# Altium PCB Thrust_Tester.PcbDoc
Units mil, origin at the board's own origin, x right, y up, seen from the top; angles counter-clockwise.
Board outline 3425.2 x 2007.87 mil, 2 copper layers (Top Layer, Bottom Layer); 81 components, 71 nets, 313 pads, 62 vias.
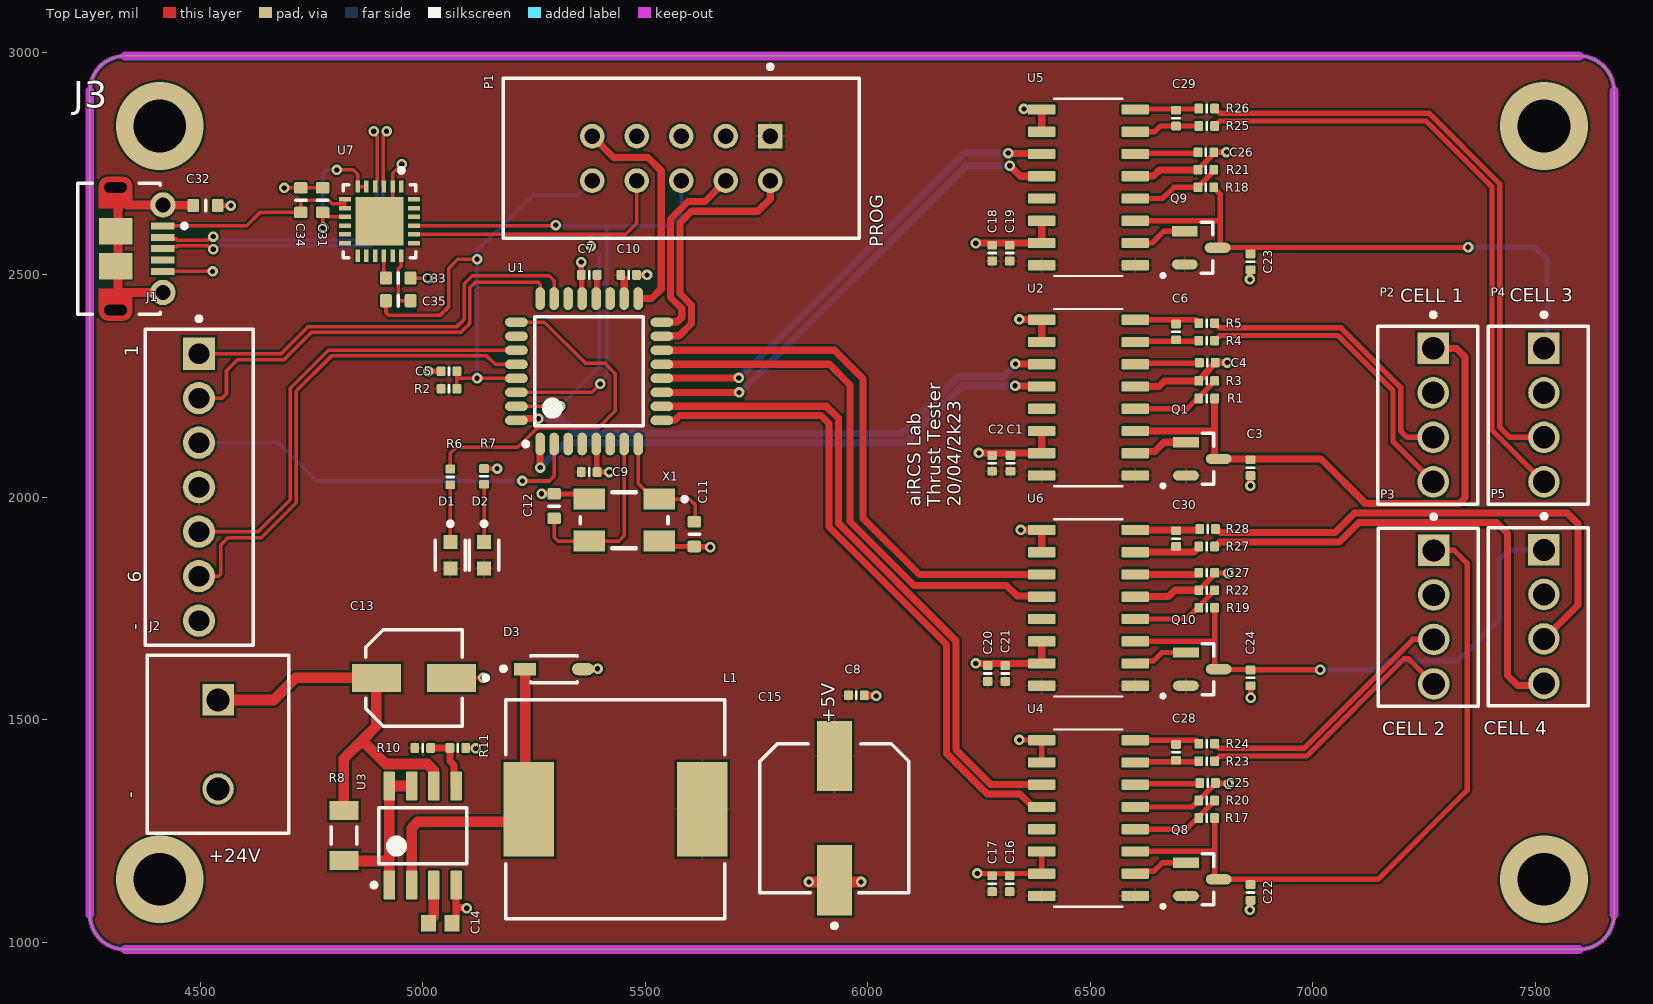
[diagram p0: Top Layer view]
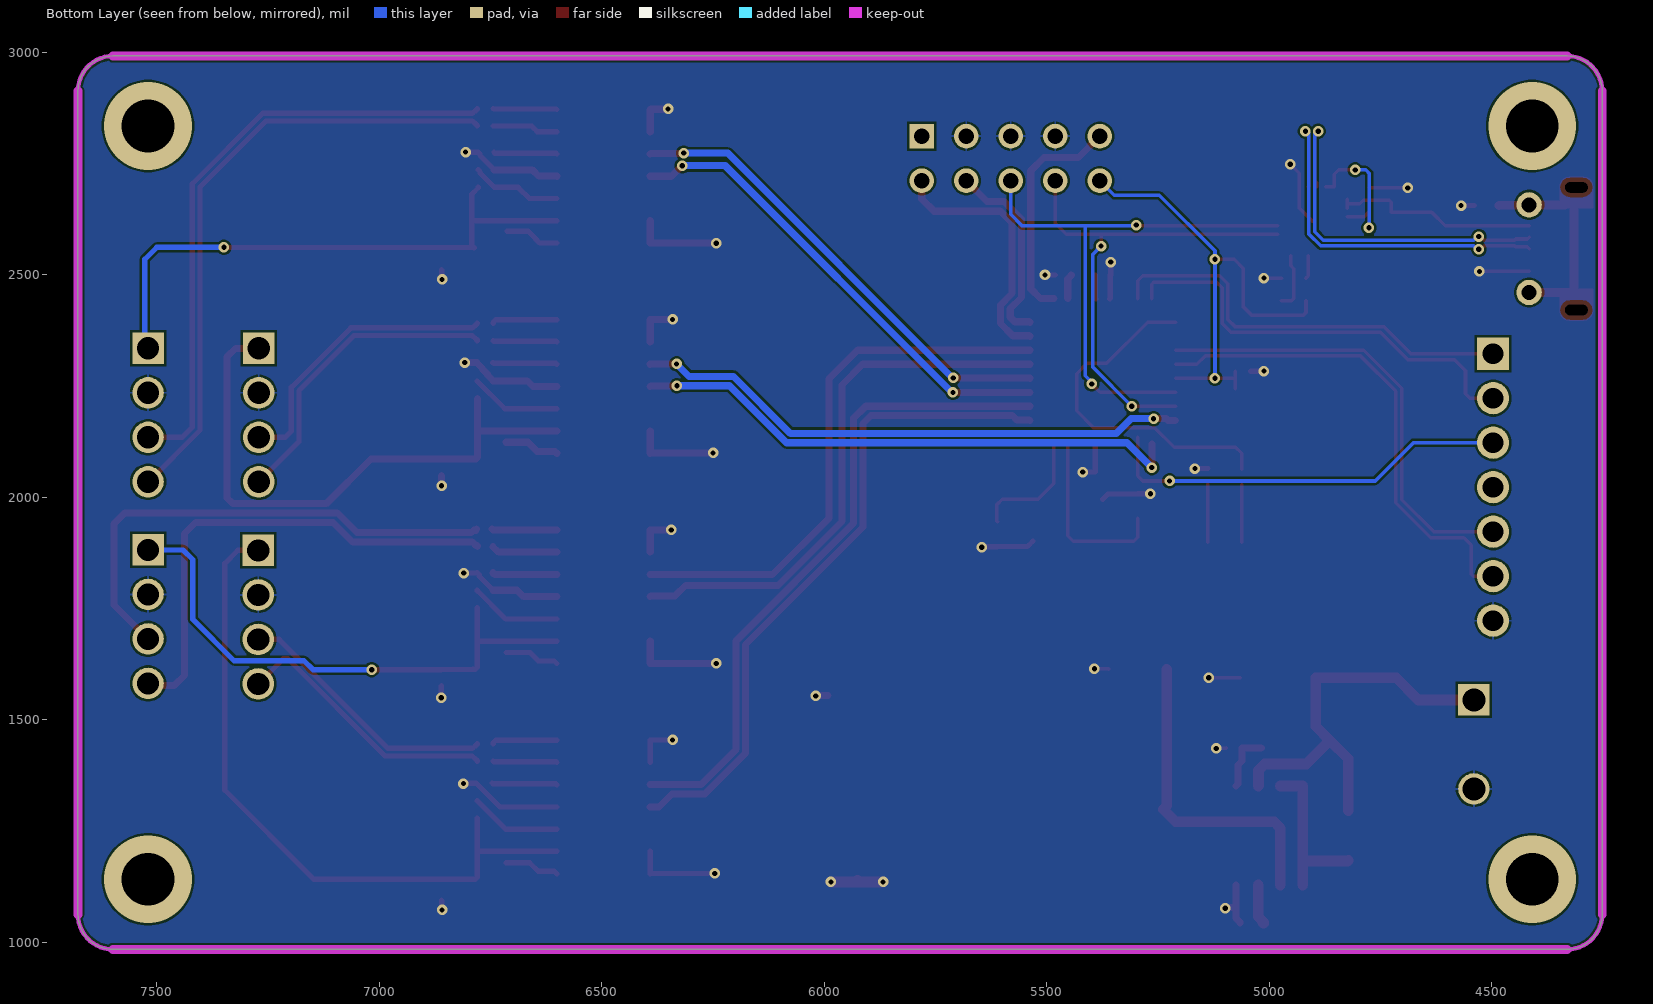
[diagram p1: Bottom Layer view, seen from below]
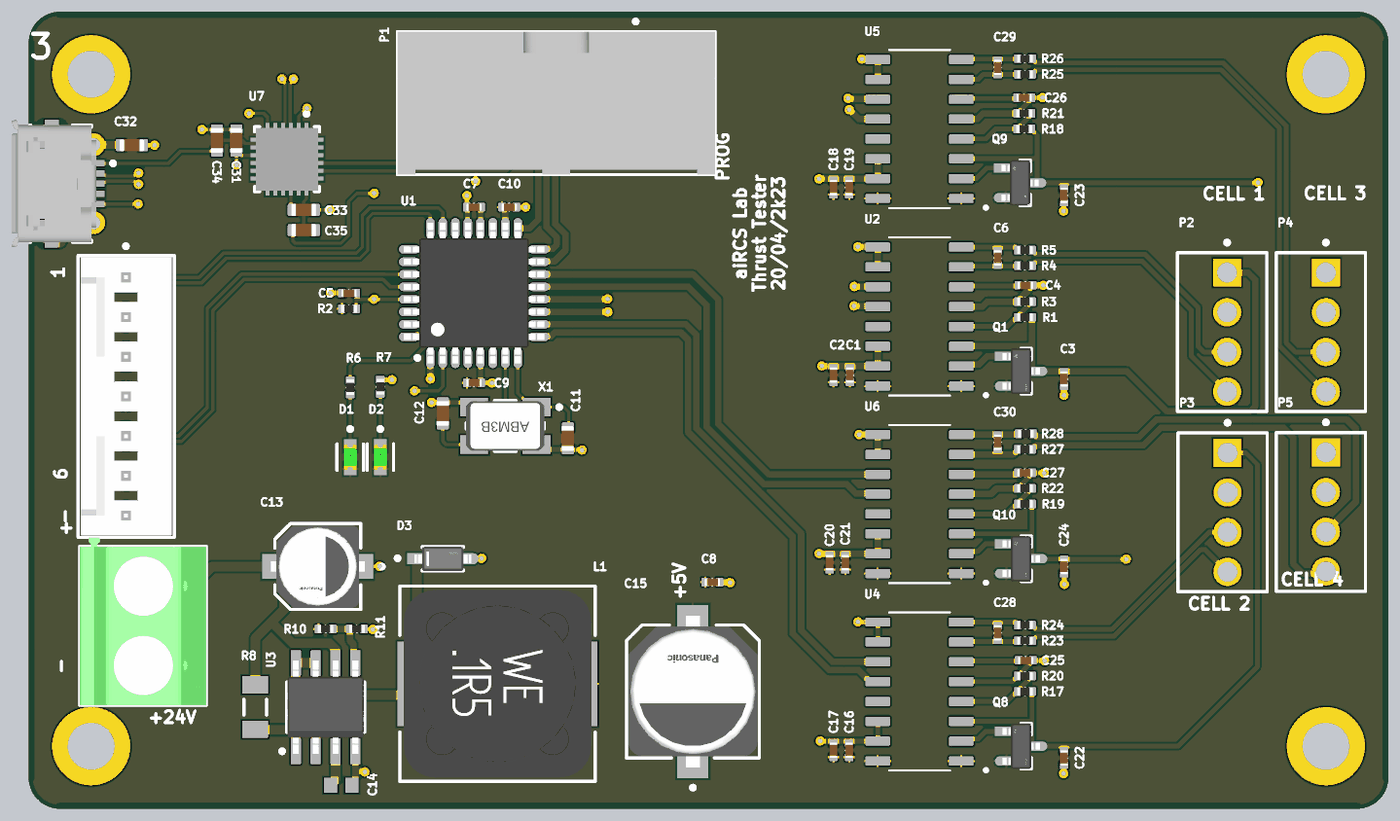
[diagram p2: 3D render of the assembled board from above, using the file's embedded part models]

## Layer stack, top to bottom
Top Solder: solder mask 0.4, Solder Resist, Dk 3.5
Top Layer: signal copper 1.4
Dielectric 1: dielectric 12.6, FR-4, Dk 4.8
Bottom Layer: signal copper 1.4
Bottom Solder: solder mask 0.4, Solder Resist, Dk 3.5

## Board outline
4251.97,1062.82 ccw(c4330.71,1062.99) 4330.71,984.25 7598.43,984.25 7598.6,984.25 ccw(c7598.43,1062.99) 7677.17,1062.99 7677.17,2913.39 7677.17,2913.56 ccw(c7598.43,2913.39) 7598.43,2992.13 4330.71,2992.13 4330.53,2992.13 ccw(c4330.71,2913.39) 4251.97,2913.39

## Design rules (kind name [scope] priority, off if disabled: settings)
BoardOutlineClearance [All] p1: gap=7.87 ignorepadtopadclearanceinfootprint=FALSE
Clearance [All] p1: gap=5 ignorepadtopadclearanceinfootprint=FALSE except(9.84: Arc-Hole Track-Hole SMDPad-Hole THPad-Hole Via-Hole Fill-Hole Poly-Hole Region-Hole Text-Hole)
ComponentClearance [All] p1: gap=5 collisioncheckmode=3 verticalgap=5 showdistances=TRUE
DiffPairsRouting [All] p1: maxlimit=10 minlimit=5 mostfreqgap=5 toplayer_minwidth=5 toplayer_maxwidth=1000 toplayer_prefwidth=5 bottomlayer_minwidth=5 bottomlayer_maxwidth=1000 bottomlayer_prefwidth=5 maxuncoupledlength=500
Height [All] p1: minheight=0 maxheight=71497.94 prefheight=500
HoleSize [All] p1: absolutevalues=TRUE maxlimit=248.03 minlimit=11.81 maxpercent=80.000 minpercent=20.000
HoleToHoleClearance [All] p1: gap=9.84 allowstackedmicrovias=FALSE
MinimumAnnularRing [All] p1: minimumring=3
MinimumSolderMaskSliver [All] p1: minsoldermaskwidth=0
PlaneClearance [All] p1: clearance=5
PlaneConnect PlaneConnectPowerPads [InPadClass('PowerPads')] p1: planeconnectstyle=Direct reliefexpansion=20 reliefentries=4 reliefconductorwidth=10 reliefairgap=10
PlaneConnect [All] p2: pad.planeconnectstyle=Relief pad.reliefexpansion=11.81 pad.reliefentries=4 pad.reliefconductorwidth=5 pad.reliefairgap=5 via.planeconnectstyle=Direct via.reliefexpansion=11.81 via.reliefentries=4 via.reliefconductorwidth=5 via.reliefairgap=5
PolygonConnect PolygonConnectPowerPads [All vs (InPadClass('PowerPads'))] p1: connectstyle=Direct reliefconductorwidth=10 reliefentries=4 polygonreliefangle="90 Angle" airgapwidth=10
PolygonConnect [All] p2: thpad.connectstyle=Relief thpad.reliefconductorwidth=5 thpad.reliefentries=4 thpad.polygonreliefangle="90 Angle" thpad.airgapwidth=5 smdpad.connectstyle=Relief smdpad.reliefconductorwidth=5 smdpad.reliefentries=4 smdpad.polygonreliefangle="90 Angle" smdpad.airgapwidth=5 via.connectstyle=Direct via.reliefconductorwidth=5 via.reliefentries=4 via.polygonreliefangle="90 Angle" via.airgapwidth=5
RoutingVias [All] p1: holewidth=11.81 width=23.62 viastyle="Through Hole" minholewidth=11.81 minwidth=23.62 maxholewidth=23.62 maxwidth=259.84
SilkToSilkClearance [All] p1: silktosilkclearance=0
SilkToSolderMaskClearance [IsPad] p1: minsilkscreentomaskgap=5 clearancetoexposedcopper=TRUE
SolderMaskExpansion [All] p1: expansion=2.95 istentingtop=FALSE
Width [All] p1: maxlimit=1000 minlimit=5 preferedwidth=5 minimp=50.000000 maximp=50.000000 favimp=50.000000
20 further rules are at their usual default settings.

## Classes and differential pairs
component class Sensors: C16 C17 C18 C19 C20 C21 C22 C23 C24 C25 C26 C27 C28 C29 C30 P3 P4 P5 Q8 Q9 Q10 R17 R18 R19 R20 R21 R22 R23 R24 R25 R26 R27 R28 U4 U5 U6
component class PSU: C13 C14 C15 D3 J1 J2 L1 R8 R10 R11 U3
component class CPU: C1 C2 C3 C4 C5 C6 C7 C8 C9 C10 C11 C12 C31 C32 C33 C34 C35 D1 D2 J3 P1 P2 Q1 R1 R2 R3 R4 R5 R6 R7 U1 U2 U7 X1
differential pair D: +D_P -D_N

## Components (designator, comment, footprint, x,y, rotation, side; value= is the part's Value field where it differs from the comment)
C1 "Capacitor 100nF +/-20% 50V 0402" CAPC0402(1005)60_L 6320.87,2076.77 r270 top value=100nF
C2 "Capacitor 10µF +/-40% 6.3V 0402" CAPC0402(1005)60_L 6279.53,2076.77 r270 top value=10µF
C3 "Capacitor 10µF +/-40% 6.3V 0402" CAPC0402(1005)60_L 6860.24,2066.93 r90 top value=10µF
C4 "Capacitor 100nF +/-20% 50V 0402" CAPC0402(1005)60_L 6763,2303 r0 top value=100nF
C5 "Capacitor 100nF +/-20% 50V 0402" CAPC0402(1005)60_L 5059.06,2283.46 r180 top value=100nF
C6 "Capacitor 100nF +/-20% 50V 0402" CAPC0402(1005)60_L 6692.91,2372.05 r270 top value=100nF
C7 "Capacitor 100nF +/-20% 50V 0402" CAPC0402(1005)60_L 5374.02,2500 r180 top value=100nF
C8 "Capacitor 100nF +/-20% 50V 0402" CAPC0402(1005)60_L 5974.41,1555.12 r180 top value=100nF
C9 "Capacitor 100nF +/-20% 50V 0402" CAPC0402(1005)60_L 5374.02,2057.09 r180 top value=100nF
C10 "Capacitor 100nF +/-20% 50V 0402" CAPC0402(1005)60_L 5462.6,2500 r180 top value=100nF
C11 "Capacitor 1µF +/-40% 50V 0603" CAPC0603(1608)100_L 5610.24,1917.32 r270 top value=22pF
C12 "Capacitor 1µF +/-40% 50V 0603" CAPC0603(1608)100_L 5295.28,1980.31 r90 top value=22pF
C13 "EEE-1AA101WR" FP-SC-MFG 4980.31,1594.49 r180 top
C14 "470pF" CAPC1608X90X35NL10T15 5039.37,1043.31 r180 top
C15 "EEEFT1E471AP" FP-FTF-MFG 5925.2,1279.53 r90 top
C16 "Capacitor 100nF +/-20% 50V 0402" CAPC0402(1005)60_L 6318.9,1131.89 r270 top value=100nF
C17 "Capacitor 10µF +/-40% 6.3V 0402" CAPC0402(1005)60_L 6279.53,1131.89 r270 top value=10µF
C18 "Capacitor 100nF +/-20% 50V 0402" CAPC0402(1005)60_L 6279.53,2549.21 r270 top value=100nF
C19 "Capacitor 10µF +/-40% 6.3V 0402" CAPC0402(1005)60_L 6318.9,2549.21 r270 top value=10µF
C20 "Capacitor 100nF +/-20% 50V 0402" CAPC0402(1005)60_L 6269.69,1604.33 r270 top value=100nF
C21 "Capacitor 10µF +/-40% 6.3V 0402" CAPC0402(1005)60_L 6309.06,1604.33 r270 top value=10µF
C22 "Capacitor 10µF +/-40% 6.3V 0402" CAPC0402(1005)60_L 6860.24,1112.2 r90 top value=10µF
C23 "Capacitor 10µF +/-40% 6.3V 0402" CAPC0402(1005)60_L 6860.24,2529.53 r90 top value=10µF
C24 "Capacitor 10µF +/-40% 6.3V 0402" CAPC0402(1005)60_L 6860.24,1594.49 r90 top value=10µF
C25 "Capacitor 100nF +/-20% 50V 0402" CAPC0402(1005)60_L 6763.78,1358.27 r0 top value=100nF
C26 "Capacitor 100nF +/-20% 50V 0402" CAPC0402(1005)60_L 6759.84,2775.59 r0 top value=100nF
C27 "Capacitor 100nF +/-20% 50V 0402" CAPC0402(1005)60_L 6761.81,1830.71 r0 top value=100nF
C28 "Capacitor 100nF +/-20% 50V 0402" CAPC0402(1005)60_L 6692.91,1427.17 r270 top value=100nF
C29 "Capacitor 100nF +/-20% 50V 0402" CAPC0402(1005)60_L 6692.91,2852.36 r270 top value=100nF
C30 "Capacitor 100nF +/-20% 50V 0402" CAPC0402(1005)60_L 6692.91,1907.48 r270 top value=100nF
C31 "Capacitor 1µF +/-40% 50V 0603" CAPC0603(1608)100_L 4775,2668 r90 top value=100nF
C32 "Capacitor 1µF +/-40% 50V 0603" CAPC0603(1608)100_L 4512,2656 r0 top value=100nF
C33 "Capacitor 1µF +/-40% 50V 0603" CAPC0603(1608)100_L 4945,2493 r0 top value=100nF
C34 "Capacitor 1µF +/-40% 50V 0603" CAPC0603(1608)100_L 4726,2668 r90 top value=100nF
C35 "Capacitor 1µF +/-40% 50V 0603" CAPC0603(1608)100_L 4945,2442 r0 top value=100nF
D1 "LTST-C190GKT" FP-LTST-C190GKT-MFG 5062,1870 r270 top
D2 "LTST-C190GKT" FP-LTST-C190GKT-MFG 5137.8,1870.08 r270 top
D3 "1N5819HW-7-F" FP-SOD123-IPC_B 5295.28,1614.17 r0 top
J1 "22-27-2071" FP-22-27-2071-MFG 4497.79,2023 r90 top
J2 "1729128" PHOE-1729128-2_V 4540,1445 r270 top
J3 "105017-0001" USB-MICRO-B_V 4363,2559 r270 top
L1 "744771220" WE-PD-L 5433.07,1299.21 r0 top
P1 "5103309-1" TECO-5103309-1_V 5581,2762 r0 top
P2 "640456-4" TECO-640456-4 7271,2185 r90 top
P3 "640456-4" TECO-640456-4 7272,1731 r90 top
P4 "640456-4" TECO-640456-4 7519.69,2185.04 r90 top
P5 "640456-4" TECO-640456-4 7519.69,1732.02 r90 top
Q1 "MMSS8550-H-TP" FP-SOT-23-IPC_B 6751.97,2086.61 r0 top
Q8 "MMSS8550-H-TP" FP-SOT-23-IPC_B 6751.97,1141.73 r0 top
Q9 "MMSS8550-H-TP" FP-SOT-23-IPC_B 6749.42,2561.02 r0 top
Q10 "MMSS8550-H-TP" FP-SOT-23-IPC_B 6751.97,1614.17 r0 top
R1 "RES" RESC0402(1005)_L 6761.81,2222.44 r0 top value=20k
R2 "1k" RESC0402(1005)_L 5059.06,2244.09 r180 top
R3 "" RESC0402(1005)_L 6761.81,2261.81 r0 top value=8.2k
R4 "100" RESC0402(1005)_L 6761.81,2352.36 r180 top
R5 "100" RESC0402(1005)_L 6761.81,2391.73 r180 top
R6 "1k" RESC0402(1005)_L 5062,2046 r270 top
R7 "1k" RESC0402(1005)_L 5137.8,2047.24 r270 top
R8 "ERJ8BQFR33V" RESC3216X70X50NL05T20 4822.83,1240.16 r90 top
R10 "3.6k" RESC0402(1005)_L 5000,1437.01 r0 top
R11 "1.2k" RESC0402(1005)_L 5078.74,1437.01 r180 top
R17 "RES" RESC0402(1005)_L 6761.81,1279.53 r0 top
R18 "RES" RESC0402(1005)_L 6759.84,2696.85 r0 top
R19 "RES" RESC0402(1005)_L 6761.81,1751.97 r0 top
R20 "RES" RESC0402(1005)_L 6761.81,1318.9 r0 top
R21 "RES" RESC0402(1005)_L 6759.84,2736.22 r0 top
R22 "RES" RESC0402(1005)_L 6761.81,1791.34 r0 top
R23 "100" RESC0402(1005)_L 6761.81,1407.48 r180 top
R24 "100" RESC0402(1005)_L 6761.81,1446.85 r180 top
R25 "100" RESC0402(1005)_L 6761.81,2834.65 r180 top
R26 "100" RESC0402(1005)_L 6761.81,2874.02 r180 top
R27 "100" RESC0402(1005)_L 6761.81,1889.76 r180 top
R28 "100" RESC0402(1005)_L 6763.78,1929.13 r180 top
U1 "ATMEGA328PB-AU" ATML-32A_L 5374.02,2283.46 r90 top
U2 "HX711" SOP127P600X180-16N 6496.06,2224.41 r180 top
U3 "MC34063ADR" D0008A_M 5000,1240.16 r90 top
U4 "HX711" SOP127P600X180-16N 6496.06,1279.53 r180 top
U5 "HX711" SOP127P600X180-16N 6496.06,2696.85 r180 top
U6 "HX711" SOP127P600X180-16N 6496.06,1751.97 r180 top
U7 "CP2104-F03-GM" FP-CP2104-F03-GM-MFG 4902.84,2620.76 r270 top
X1 "ABM3B-16.000MHZ-B2-T" ABRA-ABM3B-4_V 5452.76,1948.82 r180 top

## Footprints (in the part's own frame and the unit in brackets; to place one, negate y for a bottom-side part, rotate by r counter-clockwise, add the part's x,y. Pads: shape width x height; smd on the part's side, far side on the other; paste and mask are expansions set on the pad)
ABRA-ABM3B-4_V [mm] "SMD, 4-Leads, Body 5x3.2mm"
  rect 1.8x1.2 smd: 1(-2,-1.2) 2(2,-1.2) 3(2,1.2) 4(-2,1.2)
  silkscreen extent -3.58,-1.6 2.5,1.6, body extent -2.5,-1.59 2.5,1.59, height 1.13
ATML-32A_L [mm] "TQFP, 32-Leads, Body 7x7mm, Pitch 0.8mm, IPC High Density"
  oval 1.3x0.55 smd: 1(-4.15,2.8) 2(-4.15,2) 3(-4.15,1.2) 4(-4.15,0.4) 5(-4.15,-0.4) 6(-4.15,-1.2) 7(-4.15,-2) 8(-4.15,-2.8) 17(4.15,-2.8) 18(4.15,-2) 19(4.15,-1.2) 20(4.15,-0.4) 21(4.15,0.4) 22(4.15,1.2) 23(4.15,2) 24(4.15,2.8)
  oval 0.55x1.3 smd: 9(-2.8,-4.15) 10(-2,-4.15) 11(-1.2,-4.15) 12(-0.4,-4.15) 13(0.4,-4.15) 14(1.2,-4.15) 15(2,-4.15) 16(2.8,-4.15) 25(2.8,4.15) 26(2,4.15) 27(1.2,4.15) 28(0.4,4.15) 29(-0.4,4.15) 30(-1.2,4.15) 31(-2,4.15) 32(-2.8,4.15)
  silkscreen extent -4.27,-3.1 3.1,3.75, body extent -4.5,-4.5 4.5,4.5, height 1.2
CAPC0402(1005)60_L [mm] "Chip Capacitor, Body 1.0x0.5mm, Height 0.6mm, IPC High Density"
  rrect25% 0.5x0.55 smd: 1(-0.45,0) 2(0.45,0)
  silkscreen extent 0,-0.2 0,0.2, body extent -0.5,-0.25 0.5,0.25, height 0.6
CAPC0603(1608)100_L [mm] "Chip Capacitor, Body 1.6x0.8mm, Height 1.0mm, IPC High Density"
  rrect25% 0.66x0.76 smd: 1(-0.7,0) 2(0.7,0)
  silkscreen extent 0,-0.3 0,0.3, body extent -0.8,-0.4 0.8,0.4, height 0.95
CAPC1608X90X35NL10T15 [mm] "Chip Capacitor, 2-Leads, Body 1.60x0.80mm, IPC Medium Density"
  rect 0.85x0.95 smd: 1(-0.675,0) 2(0.675,0)
  body extent -0.85,-0.45 0.85,0.45, height 0.9
D0008A_M [mm] "SOIC, 8-Leads, Body 5x4mm, Pitch 1.27mm, IPC Low Density"
  rrect15% 1.65x0.65 smd: 1(-2.825,1.905) 2(-2.825,0.635) 3(-2.825,-0.635) 4(-2.825,-1.905) 5(2.825,-1.905) 6(2.825,-0.635) 7(2.825,0.635) 8(2.825,1.905)
  silkscreen extent -2.95,-2.5 1.6,2.9, body extent -3,-2.45 3,2.45, height 1.63
FP-22-27-2071-MFG [mm]
  rect 1.84x1.84 hole 1.19 paste-1000 mask+0: 1(7.62,0.02)
  round 1.84 hole 1.19 paste-1000 mask+0: 2(5.08,0.02) 3(2.54,0.02) 4(0,0.02) 5(-2.54,0.02) 6(-5.08,0.02) 7(-7.62,0.02)
  silkscreen extent -9.02,-3.08 9.74,3.08, body extent -9.12,-3.18 9.12,3.17, height 0.25
FP-CP2104-F03-GM-MFG [mm]
  rect 0.7x0.25 smd paste+0 mask+0: 1(-1.975,1.25) 2(-1.975,0.75) 3(-1.975,0.25) 4(-1.975,-0.25) 5(-1.975,-0.75) 6(-1.975,-1.25) 13(1.975,-1.25) 14(1.975,-0.75) 15(1.975,-0.25) 16(1.975,0.25) 17(1.975,0.75) 18(1.975,1.25)
  rect 0.25x0.7 smd paste+0 mask+0: 7(-1.25,-1.975) 8(-0.75,-1.975) 9(-0.25,-1.975) 10(0.25,-1.975) 11(0.75,-1.975) 12(1.25,-1.975) 19(1.25,1.975) 20(0.75,1.975) 21(0.25,1.975) 22(-0.25,1.975) 23(-0.75,1.975) 24(-1.25,1.975)
  rect 2.75x2.75 smd paste-1000 mask+0: 25(0,0)
  silkscreen extent -3.02,-2.07 2.08,2.07, body extent -2.42,-2.42 2.43,2.42, height 0.25
FP-FTF-MFG [mm]
  rect 4x2 smd paste+0 mask+0: 1(-3.55,0) 2(3.55,0)
  silkscreen extent -6.27,-4.25 4.25,4.25, body extent -5.8,-4.5 5.8,4.5, height 0.25
FP-LTST-C190GKT-MFG [mm]
  rect 0.8x0.8 smd paste+0 mask+0: 1(-0.75,0) 2(0.75,0)
  silkscreen extent -1.92,-0.85 0.85,0.85, body extent -1.25,-0.55 1.25,0.55, height 0.25
FP-SC-MFG [mm]
  rect 2.8x1.6 smd paste+0 mask+0: 1(-2.15,0) 2(2.15,0)
  silkscreen extent -4.23,-2.75 2.75,2.75, body extent -3.8,-3 3.8,3, height 0.25
FP-SOD123-IPC_B [mil]
  rect 49.51x27.66 smd paste+0 mask+0: 1(-64.98,0)
  rrect100% 49.51x27.66 smd paste+0 mask+0: 2(64.98,0)
  silkscreen extent -119,-31 52,31, body extent -100,-40 100,40, height 10
FP-SOT-23-IPC_B [mm]
  rect 1.474x0.585 smd paste+0 mask+0: 1(-0.935,0.95)
  rrect100% 1.474x0.585 smd paste+0 mask+0: 2(-0.935,-0.95) 3(0.935,0)
  silkscreen extent 0,-1.46 0.65,1.46, body extent -1.92,-1.71 1.92,1.71, height 0.25
PHOE-1729128-2_V [mm] "Receptacle, 2-Leads, Body 8.1x10.16mm, Pitch 5.08mm"
  rect 1.8x1.8 hole 1.3: 1(-2.54,0)
  round 1.8 hole 1.3: 2(2.54,0)
  silkscreen extent -5.08,-4.05 5.08,4.05, body extent -5.65,-4.05 5.08,4.05, height 10.01
RESC0402(1005)_L [mm] "Chip Resistor, Body 1.0x0.5mm, IPC High Density"
  rrect25% 0.5x0.55 smd: 1(-0.45,0) 2(0.45,0)
  silkscreen extent 0,-0.2 0,0.2, body extent -0.5,-0.25 0.5,0.25, height 0.3
RESC3216X70X50NL05T20 [mm] "Chip Resistor, 2-Leads, Body 3.20x1.60mm, IPC Medium Density"
  rect 1.1x1.65 smd: 1(-1.425,0) 2(1.425,0)
  silkscreen extent -0.5,-0.72 0.5,0.72, body extent -1.63,-0.82 1.62,0.82, height 0.7
SOP127P600X180-16N [mm]
  rrect25% 1.58x0.59 smd: 1(-2.67,4.445) 2(-2.67,3.175) 3(-2.67,1.905) 4(-2.67,0.635) 5(-2.67,-0.635) 6(-2.67,-1.905) 7(-2.67,-3.175) 8(-2.67,-4.445) 9(2.67,-4.445) 10(2.67,-3.175) 11(2.67,-1.905) 12(2.67,-0.635) 13(2.67,0.635) 14(2.67,1.905) 15(2.67,3.175) 16(2.67,4.445)
  silkscreen extent -4.35,-5.06 1.95,5.13
TECO-640456-4 [mm] "Through Hole, 4-Leads, Body 10.16x5.72mm, Pitch 2.54mm"
  rect 1.8x1.8 hole 1.27 paste+0: 1(3.81,0)
  round 1.8 hole 1.27 paste+0: 2(1.27,0) 3(-1.27,0) 4(-3.81,0)
  silkscreen extent -5.08,-2.54 5.86,3.18, body extent -5.08,-2.54 5.08,3.18, height 10.03
TECO-5103309-1_V [mm] "Male Header, 10-Leads, Body 20.32x9.144mm, Pitch 2.54mm"
  rect 1.4x1.4 hole 0.889: 1(5.08,1.27)
  round 1.4 hole 0.889: 2(5.08,-1.27) 3(2.54,1.27) 4(2.54,-1.27) 5(0,1.27) 6(0,-1.27) 7(-2.54,1.27) 8(-2.54,-1.27) 9(-5.08,1.27) 10(-5.08,-1.27)
  silkscreen extent -10.16,-4.57 10.16,5.35, body extent -10.16,-4.57 10.16,4.57, height 9.85
USB-MICRO-B_V [mm] "USB, MICRO B, Body 7.491x4.695 mm, Pitch 0.65 mm"
  rect 0.4x1.35 smd: 1(-1.3,1.35) 2(-0.65,1.35) 3(0,1.35) 4(0.65,1.35) 5(1.3,1.35)
  round 1.45 hole 0.85: 6(-2.5,1.35) 7(2.5,1.35)
  rrect50% 0x0 hole 0.6 slot 1.3 at 90 deg: 8(-3.5,-1.35) 11(3.5,-1.35)
  rect 1.5x1.9 smd: 9(-1,-1.35) 10(1,-1.35)
  Top Layer circle w0.5: c-3.6,-1.8 r0.25
  Top Layer circle w0.5: c-3.6,-0.9 r0.25
  Top Layer circle w0.5: c3.6,-1.8 r0.25
  Top Layer region: -3.6,-1.8 -3.6,-0.9 -4.1,-0.9 -4.1,-1.8
  Top Layer region: 3.6,-0.9 3.6,-1.8 4.1,-1.8 4.1,-0.9
  Top Layer region: 2.3,-0.4 2.3,-2.3 3.6,-2.3 3.6,-0.4
  Top Layer region: -2.3,-2.3 -2.3,-0.4 -3.6,-0.4 -3.6,-2.3
  Top Layer lines w0.5: 3.5,-1.129 ccw(c3.6,-0.9) 3.6,-0.65 ccw(c3.6,-0.9) 3.5,-0.671 ccw(c3.6,-0.9) 3.5,-1.129
  silkscreen extent -3.75,-3.5 3.75,2.7, body extent -4.1,-3.9 4.1,1.5, height 2.67
WE-PD-L [mm] "SMD Inductor, 2-Leads, Body 12.0 x 12.0 mm"
  rect 2.9x5.4 smd: 1(-4.95,0) 2(4.95,0)
  silkscreen extent -6.25,-6.25 6.25,6.25, body extent -6,-6 6,6, height 5.98

## Part data
C1 C4 C5 C6 C7 C8 C9 C10 C16 C18 C20 C25 C26 C27 C28 C29 C30: library part CMP-001-00067-3, "Chip Capacitor, 100nF +/-20%, 50V, 0402, Thickness 0.6 mm", Case/Package=0402, Max Operating Temperature=85°C, Min Operating Temperature=-55°C, Tolerance=10%, Voltage Rating=50V, Mounting Technology=SMT, Pins=2
C2 C3 C17 C19 C21 C22 C23 C24: library part CMP-001-00074-3, "Chip Capacitor, 10µF +/-40%, 6.3V, 0402, Thickness 0.6 mm", Case/Package=0402, Max Operating Temperature=85°C, Min Operating Temperature=-55°C, Tolerance=10%, Voltage Rating=6.3V, Mounting Technology=SMT, Pins=2
C11 C12 C31 C32 C33 C34 C35: library part CMP-001-00078-4, "Chip Capacitor, 1µF +/-40%, 50V, 0603, Thickness 1 mm", Case/Package=0603, Max Operating Temperature=85°C, Min Operating Temperature=-55°C, Tolerance=10%, Voltage Rating=50V, Mounting Technology=SMT, Pins=2
C13: library part CMP-05427-000047-1, "CAP ALUM 100UF 20% 50V SMD", Capacitance=100uF, Case/Package=Radial, Max Operating Temperature=85°C, Min Operating Temperature=-40°C, Package Quantity=1, Ripple Current=50mA, Tolerance=20%, Voltage Rating=10V, Construction=Cylindrical, Contact Plating=Tin, Diameter=5mm, Height=5.4mm, Height - Seated (Max)=0.213inch, Lead Free="Lead Free", Length=5.5mm, Life (Hours)=1000Hour, Mount="Surface Mount", Packaging="Tape and Reel", Radiation Hardening=No, Ripple Current (AC)=50mA, RoHS Compliant=Yes, Series=S, Termination=SMD/SMT, Voltage Rating (DC)=10V
C14: library part CMP-2006-02921-1, Manufacturer=Murata, Part Number=GRM188R71H471KA01D
C15: library part CMP-05427-000040-1, "CAP ALUM 470UF 20% 25V SMD", Capacitance=470uF, Case/Package=Radial, Dielectric Material=Aluminium, ESR (Equivalent Series Resistance)=80mR, Leakage Current=117.5uA, Max Operating Temperature=105°C, Min Operating Temperature=-55°C, Package Quantity=500, Ripple Current=850mA, Tolerance=20%, Voltage=25V, Construction=Cylindrical, Contact Plating=Tin, Diameter=8mm, Features="General Purpose", Height=10.2mm, Height - Seated (Max)=0.413inch, Lead Diameter=0.9mm, Lead Free="Lead Free", Lead Pitch=3.1mm, Length=10.2mm, Life (Hours)=2000Hour, Mount="Surface Mount", Number of Pins=2, Packaging="Tape and Reel", Radiation Hardening=No, REACH SVHC="No SVHC", Ripple Current (AC)=850mA, RoHS Compliant=Yes, Series=FT, Termination=SMD/SMT, Voltage Rating=25V, Voltage Rating (DC)=25V
D1 D2: library part CMP-22017-000005-2, "LED GREEN CLEAR CHIP SMD", Case Code (Imperial)=0603, Case Code (Metric)=1608, Color=Green, Forward Current=30mA, Forward Voltage=2.1V, Lens Color=Colorless, Max Operating Temperature=85°C, Min Operating Temperature=-55°C, Package Quantity=1, Power Dissipation=100mW, Reverse Voltage=5V, Test Current=10mA, Voltage=2V, Case/Package=0603, Depth=0.8mm, Dominant Wavelength=569nm, Height=0.8mm, Illumination Color=Green, Lead Free="Lead Free", Length=1.6mm, Lens Style=Clear, Lens Transparency=Clear, Luminous Intensity=6mcd, Mount="Surface Mount", Number of Elements=1, Number of LEDs=1, Number of Pins=2, Packaging="Tape and Reel", Power Rating=100mW, Radiation Hardening=No, Viewing Angle=130°, Wavelength=565nm, Width=0.8mm
D3: library part CMP-0303-00003-3, "DIODE SCHOTTKY 40V 1A SOD123", Average Rectified Current=1A, Capacitance=110pF, Case/Package=SOD-123-2, Forward Voltage=450mV, Max Forward Surge Current (Ifsm)=25A, Max Operating Temperature=125°C, Max Power Dissipation=450mW, Max Repetitive Reverse Voltage (Vrrm)=40V, Min Operating Temperature=-65°C, Package Quantity=3000, Peak Reverse Current=50uA, Contact Plating=Tin, Current Rating=1A, Element Configuration=Single, Forward Current=1A, Height=1.25mm, Lead Free="Lead Free", Length=2.85mm, Max Reverse Voltage (DC)=40V, Number of Pins=2, Output Current=1A, Packaging="Tape and Reel", Peak Non-Repetitive Surge Current=25A, Polarity=Standard, Radiation Hardening=No, REACH SVHC="No SVHC", Termination=SMD/SMT, Voltage Rating (DC)=40V, Weight=0.000353oz, Width=1.7mm
J1: library part CMP-04776-000328-1, "CONN HEADER VERT 7POS 2.54MM", Color=Natural, Contact Resistance=10mR, Current Rating=4A, Flammability Rating="UL94 V-0", Housing Color=White, Insulation Resistance=50GR, Max Operating Temperature=75°C, Max Voltage Rating (AC)=250V, Min Operating Temperature=0°C, Package Quantity=10, Connector Type="Male Pin", Contact Material=Brass, Contact Mating Length=0.295inch, Contact Plating=Tin, Contact Type="Male Pin", Depth=5.8mm, Fastening Type=Friction, Gender=Male, Glow Wire Compliant=Non-compliant, Halogen Free="Low Halogen", Height=8.38mm, Housing Material=Nylon, Lead Free="Lead Free", Length=5.08mm, Max Current Rating=4A, Mount="Through Hole", Number of Circuits=7, Number Of Contacts=7, Number of Positions=7, Number of Rows=1, Orientation=Straight, Packaging=Bulk, Pitch=2.54mm, Radiation Hardening=No, RoHS Compliant=Yes, Series=KK, Termination=Solder, Voltage Rating=250V, Voltage Rating (DC)=250V
J2: library part CMP-2000-05815-1, "PCB Terminal Block, 13.5 A, 400 V, 2-Pin THD, RoHS, Bulk", Current Rating=13500mA, Manufacturer="Phoenix Contact", Package Description="2-Pin Through Hole Device, Body 8.1 x 10.16 mm, Pitch 5.08 mm", Package Reference=1729128-2, Package Version=03/2015, Voltage Rating=400V, Datasheet URL=https://datasheet.ciiva.com/16046/1729128-16046181.pdf, Datasheet Version=12/2013, Manufacturer URL=http://www.phoenixcontact.com/, Mounting Technology=ThroughHole, No. of Positions=2, No. of Rows=1, Orientation=Horizontal, Package URL=https://www.phoenixcontact.com/online/portal/pi/pxc/product_detail_page/!ut/p/b1/3VdJjqNKFDxLH8AFycySyWY2ozFsEPOMMQaDOX1XedGL_1Vdm5YXJleknhSKeBkvI6EA8ncAo3AYoDhBQGco6KN7VURTdemj9us_IEKEZo_YHiPAEWEFmDGOHMORkqKYCORBZxgL7ZoaZYcbFFUZ3fqxSY6GOuxydWUuHqz1ynmMFygu583Bob0Ewr6Sd_l-5m-kAueHiB0jpRwZwe58wwtkpxtMYd_LmGcDRU02dRNEyWt6Y2ti5pSyJ_reIkzIulrqApdnbT11V5jnCKbYNCvhEM1MCpPByat_X379-iThf08CI5GfOPqfBeS3BRoBOdD55AKVv0iLwCMq-2BrzXWSGRH7pUGD9uwXQjiph3xL0DKQwdGa0JImiIOmBNOestqgwTHSSs2oOep-78apyXQBvNi8ZLaFjvjWvcaUEBu0MC6Wbe-d6mB0FAebo2lUWinqYaZs5DAYzV0RP9yitUjnGJ0iI9xhZkT42OCQNUJJhkgWINNQLP2JFP6OpMg3JCVg70jqHT0lvKOnhHf0lPuOnnLf0VPuWx6_dxwUIvwk5WMkT0kLL1mh61l2yZVSzG3pYV_bqo-mj6uMKwKwdnnW8Jh5RTOJzMOA5c-eJDaZQw4mTMPH02PvS_ZAqNVjVTo2WyYLkwH_KU1mmmG5kjRhDqPXLwwVHvVOjCM60-fpXvTDfMGW1PVFVS1r4e4yVDk4ZdNbkUHvqPqQSeian4UD39fNKmachqdJ1NJbyk8rXT9mXTvPk3oE5meulKGgiruPJek-4I9hTT6G8ZLOyRSm2RRVbThERQad5OS28hdt4YW4vG0stgYYzsWsK4_7y6DZMjJSCqri1kyiZR5vD7pwIrNR7QwPHTcLTI5qT7eRlpHrdGiupYlqQDJ7zy_CND8fWWBoLRXxk1RVcXiBQwbTD4Xi7KL-FuO94t9xaqweXzH, Packing=Bulk, PartNumber=1729128, Pitch=5.08mm, RoHS=TRUE
J3: library part CMP-2000-05827-1, "Micro-USB B Receptacle, Right Angle, Bottom Mount, Surface Mount, with Solder Tabs, -30 to 85 degC, 5-Pin USB, RoHS, Tape and Reel", Manufacturer=Molex, Package Description="5-Leads USB, Micro B, Body 7.5 x 5 mm, Pitch 0.65 mm", Package Reference=MICRO-B, Package Version="Rev. F, 12/2012", Standard Package=1, Voltage - Max=30V, 3D Model=105017-0001.stp, Catalog Drawings=1050170001, Category=Connectors,Interconnects, Circuits=5, Connector Type=USB-microB, Datasheet URL=http://www.molex.com/elqNow/elqRedir.htm?ref=http://www.molex.com/webdocs/datasheets/pdf/en-us/1050170001_IO_CONNECTORS.pdf, Datasheet Version=03/2016, Family=USB,DVI,HDMIConnectors, Featured Product=Micro-USBConnectorsUSBConnectors, Features=Shielded,SolderRetention, Gender=Receptacle, Ingress Protection=-, Manufacturer URL=http://www.molex.com/, Mating Products=WM17145-ND-CABLEMICROUSBBTOSTDA1.0MWM17147-ND-CABLEMICROUSBBTOSTDA2.0MWM17146-ND-CABLEMICROUSBBTOSTDA1.5M, Mounting Technology=SurfaceMount, Mounting Type=BoardCutout,SurfaceMount,RightAngle, Number Of Contacts=5, Online Catalog=Molex-MicroUSB, Other Names=WM1399DKR, Package URL=http://www.molex.com/pdm_docs/sd/1050170001_sd.pdf, Packaging=Digi-Reel®, PCN Assembly/Origin=ResinSupplier21/Oct/2015, RoHS Information=1050170001CertofCompliance, Series=-, Specifications=-
L1: library part CMP-0227-00735-1, "SMD-Shielded Power Inductor WE-PD, L = 220 µH", Inductance="220 ÂµH", ComponentLink1Description="Manufacturer Link", ComponentLink1URL=http://www.we-online.com, ComponentLink2Description=Datasheet, ComponentLink2URL=http://www.we-online.de/katalog/media/pdf/744771220.pdf, DatasheetVersion="ver 6, Jun-2005", PackageDescription="SMD Inductor, 2-Leads, Body 12.0 x 12.0 mm", PackageReference=WE-PD-L, PackageVersion=2006
P1: library part CMP-2000-07502-1, "Male Header, Pitch 2.54 mm, 2 x 5 Position, Height 9.855 mm, Tail Length 3.048 mm, -65 to 105 degC, RoHS, Tube", Colour=Black, Current Rating=1A, Flammability Rating=UL94V-0, Insulation Resistance=5GR, Manufacturer="TE Connectivity", Max Operating Temperature=105degC, Min Operating Temperature=-65degC, Package Description="Male Header, Pitch 2.54 mm, 2 x 5 Position, Height 9.855 mm, Tail Length 3.048 mm", Package Quantity=35, Board Standoff=Yes(With), Body Material=Thermoplastic, Connector System=Wire-to-Board, Connector Type=Header, Contact Gender=Male, Contact Material=CopperAlloy, Contact Mating Length=0.24inch, Contact Plating=Gold, Contact Shape=Square, Datasheet URL=http://www.te.com/commerce/DocumentDelivery/DDEController?Action=showdoc&DocId=Customer+Drawing%7F5103309%7FE1%7Fpdf%7FEnglish%7FENG_CD_5103309_E1.pdf%7F5103309-1, Datasheet Version="Rev. E1, 03/2011", Depth=9.14mm, ELV=Compliant, Gender=Male, Height=8.813mm, Housing Colour=Black, Housing Material=PBT, Lead Free=LeadFree, Length=0.8inch, Manufacturer URL=http://www.te.com/, Mating Alignment=Yes(With), Mating Connector Lock=No(Without), Mating Retention=No(Without), Max Current Rating=1A, Mount=ThroughHole, Mounting Technology=ThroughHole, Number Of Contacts=10, Number of Positions=10, Number of Rows=2, Orientation=Straight, Package Reference=5103309-1, Packaging=Rail/Tube, Panel Mount Retention=No(Without), PCB Mount Alignment=No(Without), PCB Mount Retention=Without, PCB Mounting Orientation=Vertical, Pitch=2.54mm, REACH SVHC=NoSVHC, RoHSCompliant=True, Row Spacing=2.54mm, Shrouded=Yes(With), Shrouded End Dimension=3.81mm, Termination=ThroughHole, Termination Post Length=0.12inch
P2 P3 P4 P5: library part CMP-2000-05419-1, "Male Header, Pitch 2.54 mm, 1 x 4 Position, Height 10.03 mm, Tail Length 3.56 mm, RoHS, Bulk", Color=White, Current, Rating="5 /  / A", Flammability Rating=UL94V-0, Manufacturer="TE Connectivity", Temperature, Operating="-55to+105 /  / degC", Voltage, Rating="250 /  / V", Agency Approvals=CSA,UL, Angle=Straight, Brand/Series=MTA-100Series, Color, Housing=White, Connector Type=MTA-100, Contact Centerline Spacing="0.100 /  / in.", Contact Mating Area Plating=Tin, Contact Plating=Tin, Contact Shape=Square, Contact Termination Area Plating=Tin, Datasheet URL=https://datasheet.ciiva.com/16286/eng-ds-82056-mta-0608-16286228.pdf, Datasheet Version=Dec-14, Length, Overall="0.4 /  / \"", Length, Pin="0.14 /  / \"", Length, Terminal Post="0.14 /  / in.", Manufacturer URL=http://www.te.com/, Material, Contact=CopperAlloy, Material, Housing=Polyester, Mount Angle=Vertical, Mounting Hole Size="0.04 /  / \"", Mounting Type=PCMount, Number Of Contacts=4, Number of Positions=4, Number of Rows=1, Pin Spacing="0.1 /  / \"", Primary Type=InterconnectSystem, Size, Post="0.025 /  / in.", Special Features=Pinstrip, Standards=RoHSCompliant,ELVCompliant,UL94V-0, Termination=Solder, Type=PCBPlug
Q1 Q8 Q9 Q10: library part CMP-56214-000002-1, "TRANS PNP 25V 1.5A SOT23", Case/Package=SOT-23, Collector Base Voltage (VCBO)=40V, Collector Emitter Breakdown Voltage=25V, Collector Emitter Saturation Voltage=500mV, Emitter Base Voltage (VEBO)=1.6V, Max Collector Current=1.5A, Max Operating Temperature=150°C, Max Power Dissipation=625mW, Min Operating Temperature=-55°C, Package Quantity=1, Transition Frequency=100MHz, Collector Emitter Voltage (VCEO)=500mV, Element Configuration=Single, Gain Bandwidth Product=100MHz, hFE Min=40, Lead Free="Lead Free", Max Breakdown Voltage=25V, Mount="Surface Mount", Packaging="Tape and Reel", Polarity=PNP
R1 R3 R17 R18 R19 R20 R21 R22: library part CMP-009-00062-5, "Resistor 0402", Case/Package=0402, Mounting Technology=SMT, Pins=2
R2 R4 R5 R6 R7 R11 R23 R24 R25 R26 R27 R28: library part CMP-009-00062-5, Case/Package=0402, Mounting Technology=SMT, Pins=2
R8: library part CMP-2003-00751-1, Manufacturer=Panasonic, Part Number=ERJ8BQFR33V
R10: library part CMP-009-00062-5, "3.8k", Case/Package=0402, Mounting Technology=SMT, Pins=2
U1: library part CMP-2000-07439-1, "AVR Microcontroller, 1.8 to 5.5 V, 32 KB Flash, 1 KB EEPROM, 2 KB SRAM, -40 to 85 degC, 32-Pin TQFP (32A), RoHS, Tray", Manufacturer=Microchip, Package Description="32-Pin Thin Profile Plastic Quad Flat Package, Body 7 x 7 mm, Pitch 0.8 mm", Package Reference=32A, Datasheet URL=http://ww1.microchip.com/downloads/en/DeviceDoc/40001906A.pdf, Datasheet Version="Rev. A, 04/2017", Manufacturer URL=http://www.microchip.com/, Mounting Technology=SurfaceMount, RoHSCompliant=false
U2 U4 U5 U6: "<h3>AVIA Semiconductor HX711 - ADC</h3> <p>24-Bit Analog-to-Digital Converter for Weigh Scales <li><a href=â€https://cdn.sparkfun.com/datasheets/Sensors/ForceFlex/hx711_english.pdfâ€>Datasheet</a></li> </p> <p><b>SparkFun Products:</b> <ul><li><a href=â€https://www.sparkfun.com/products/13879â€>SparkFun Load Cell Amplifier - HX711 </a></li> </ul></p>", Package=None, Availability=Unavailable, Check_prices=https://www.snapeda.com/parts/HX711/AVIA%20SEMICONDUCTOR/view-part/4804859/?ref=eda, MF="AVIA SEMICONDUCTOR", MP=HX711, Price=None, SnapEDA_Link=https://www.snapeda.com/parts/HX711/AVIA%20SEMICONDUCTOR/view-part/4804859/?ref=snap
U3: library part CMP-0323-00183-3, "Buck Inverting Buck-Boost Regulator with 3 to 40 V Input and 1.55 to 40 V Output, 0 to 70 degC, 8-Pin SOIC (D), Green (RoHS & no Sb/Br)", Manufacturer="Texas Instruments", Rating=Catalog, Switch Current Limit(Typ)(A)=1.5, Code_JEDEC=MS-012AA, ComponentLink1Description=Datasheet, ComponentLink1URL=http://www.ti.com/general/docs/lit/getliterature.tsp?genericPartNumber=MC34063A&fileType=pdf, ComponentLink2Description="Package Specification", ComponentLink2URL=http://www.ti.com/litv/pdf/msoi002j, ComponentLink3Description="URL Link1", ComponentLink3URL="Samples URL:http://www.ti.com/product/mc34063a#samples", DatasheetVersion=SLLS636M, Duty Cycle(Max)(%)=90, Eco-Plan="Green (RoHS & no Sb/Br)", Iout(Max)(A)=0.75, Iq(Typ)(mA)=4, Mounting Technology="Surface Mount", PackageDescription="8-Pin Plastic Small Outline Integrated Circuit, 4.9 x 3.9 mm, Pitch 1.27 mm Pitch", PackageReference=D0008A, PackageVersion="revM, Jun-2011", PartNumber=MC34063ADR, Regulated Outputs(#)=1, SubFamily="Step-Down Regulator", Topology="Buck, Inverting Buck-Boost", Vin(Max)(V)=40, Vin(Min)(V)=3, Vout(Max)(V)=40, Vout(Min)(V)=1.55
U7: library part CMP-0511-00004-2, "IC SGL USB-TO-UART BRIDGE 24QFN", Case/Package=QFN, Max Operating Temperature=85°C, Max Supply Voltage=3.6V, Min Operating Temperature=-40°C, Min Supply Voltage=3V, Operating Supply Current=17mA, Operating Supply Voltage=3.3V, Contact Plating=Tin, Data Rate=2Mbps, Number of Channels=1, Number of Pins=24, Number of Transceivers=1, Packaging=Rail/Tube, Radiation Hardening=No, Weight=0.001764oz
X1: library part CMP-1688-00003-1, "Ceramic SMD Crystal, 16 MHz, +/- 20 ppm, 50 Ohm, -20 to 70 degC, 4-Pin SMD, RoHS, Tape and Reel", Case/Package=5028, Current Rating="1.82 A", Max Operating Temperature=105degC, Min Operating Temperature=-40degC, Package Quantity=500, Resistance="0.033 Ohm", Tolerance=30%, ComponentLink1Description="Manufacturer URL", ComponentLink1URL=http://www.abracon.com/, ComponentLink2Description=Datasheet, ComponentLink2URL=http://www.abracon.com/Resonators/abm3b.pdf, DatasheetVersion=Aug-15, Height="2.8 mm", Length="0.197 inch", Mount="Surface Mount", PackageDescription="4-Pin Surface Mount Device, Body 5 x 3.2 mm", PackageReference=ABM3B, Packaging="Tape and Reel", REACH SVHC=Unknown, RoHSCompliant=True, Shielding=Shielded, Width="0.197 inch"

## Via types
v1: diameter 23.62, hole 11.81, Top Layer to Bottom Layer, 58 vias
v2: diameter 196.85, hole 118.11, Top Layer to Bottom Layer, 4 vias

## Nets (pads, with @x,y where several pads share a name; then routed paths per layer and width w, separated by ;. In a path a pad name is that pad's centre, name@x,y a point inside that pad or via, vN(x,y) a via of type N, cw(c..) or ccw(c..) an arc to the next point about the centre after c; other vN are vias at no path point)
+5V: C1.2 C2.2 C8.2 C9.2 C10.2 C15.2 C16.2 C17.2 C18.2 C19.2 C20.2 C21.2 D1.2 D2.2 J1.4 L1.2 P1.1 Q1.2 Q8.2 Q9.2 Q10.2 R2.2 R10.1 U1.4 U1.18 U2.1 U2.16 U4.1 U4.16 U5.1 U5.16 U6.1 U6.16 | length 56.4
  Top Layer w16: C10.2 5444.88,2499.02 5452.76,2491.14 U1.18
+24V: C13.2 J2.1 R8.2 U3.6 | length 928.4
  Top Layer w24: J2.1 4665,1545 4714.49,1594.49 C13.2 4895.67,1485.67 4864,1454 ; R8.2 4822.83,1412.83 4864,1454 ; U3.6 5024.2,1352.17 5024.2,1386.94 5010.15,1401 4917,1401 4864,1454
AVDD: C3.2 P2.1 Q1.3 R1.2 U2.3 | length 1318.7
  Top Layer w16: U2.3 6777.12,2149.41 6779.53,2147 ; R1.2 6779.53,2147 ; P2.1 7323,2335 7342,2316 7342,1999 7329,1986 7119,1986 7018.39,2086.61 6860.24,2086.61 Q1.3 6782.77,2086.61 6779.53,2089.86 6779.53,2147
AVDD_1: C22.2 P3.1 Q8.3 R17.2 U4.3 | length 1561.2
  Top Layer w12: U4.3 6778,1204.53 6779.53,1203 ; R17.2 6779.53,1203 ; P3.1 7318,1881 7347,1852 7347,1342 7146.73,1141.73 Q8.3 6784.62,1141.73 6779.53,1146.83 6779.53,1203
AVDD_2: C23.2 P4.1 Q9.3 R18.2 U5.3 | length 1283.7
  Top Layer w12: U5.3 6790.08,2621.85 6792,2623.77 ; R18.2 6777.56,2695.87 6792,2681.43 6792,2623.77 ; Q9.3 6786.73,2561.51 7348.51,2561.51 v1(7349,2562) ; Q9.3@6792,2566.12 6792,2623.77
  Bottom Layer w12: v1(7349,2562) 7500,2562 7527,2535 7527,2342.35 P4.1
AVDD_3: C24.2 P5.1 Q10.3 R19.2 U6.3 | length 1244.8
  Top Layer w12: U6.3 6778.5,1676.97 6779.53,1678 ; R19.2 6779.53,1678 ; v1(7017,1613) 7016.6,1612.6 6860.63,1612.6 C24.2 6859.25,1613.19 6789.77,1613.19 Q10.3 6784.62,1614.17 6779.53,1619.27 6779.53,1678
  Bottom Layer w12: v1(7017,1613) 7149,1613 7169,1633 7326,1633 7419,1726 7419,1860 7441.02,1882.02 P5.1
CLK: U1.32 U2.11 | length 1260.4
  Top Layer w16: U1.32 5226.92,2173.23 5230.7,2177 v1(5260,2177) ; v1(6332,2300) 6332.3,2299.7 6390.65,2299.7 U2.11
  Bottom Layer w16: v1(5260,2177) 5311,2177 5344,2144 6076.3,2144 6204.3,2272 6304,2272 v1(6332,2300)
CPU_X1: C12.1 U1.7 X1.3 | length 414.7
  Top Layer w8: C12.1 5295.28,1910.72 5304.43,1901.57 X1.3 5440.57,1901.57 5452.76,1913.76 U1.7
CPU_X2: C11.1 U1.8 X1.1 | length 275.9
  Top Layer w8: U1.8 5484.25,2031.5 5519.69,1996.06 X1.1 5599.94,1996.06 5612,1984 5612,1946.65 C11.1
D_N: J3.2 U7.4 | length 859.4
  Top Layer w8: J3.2 4420.02,2580.72 4445.85,2580.72 4448.27,2578.3 4516.96,2578.3 4524.77,2586.11 v1(4529,2586.11) ; v1(4890.19,2823) 4890.19,2818.77 4898,2810.96 4898,2712.37 4893,2707.37 U7.4
  Bottom Layer w8: v1(4529,2586.11) 4533.23,2586.11 4541.04,2578.3 4879,2578.3 4898,2597.3 4898,2818.31 4893.31,2823 v1(4890.19,2823)
D_P: J3.3 U7.3 | length 879.5
  Top Layer w8: J3.3 4420.02,2562.87 4445.85,2562.87 4448.27,2565.3 4516.96,2565.3 4524.77,2557.48 v1(4529,2557.48) ; U7.3 4911.76,2699.43 4911.76,2710.13 4911,2710.9 4911,2810.96 4918.81,2818.77 v1(4918.81,2823)
  Bottom Layer w8: v1(4529,2557.48) 4533.23,2557.48 4541.04,2565.3 4884.38,2565.3 4911,2591.91 4911,2818.31 4915.69,2823 v1(4918.81,2823)
DATA: U1.1 U2.12 | length 1257
  Top Layer w16: U1.1 5263.89,2119.97 5263.89,2067.11 v1(5264,2067) ; v1(6331,2251) 6331.8,2250.2 6390.15,2250.2 U2.12
  Bottom Layer w16: v1(5264,2067) 5320,2123 6085,2123 6213,2251 v1(6331,2251)
GND: C1.1 C2.1 C3.1 C4.2 C5.2 C7.2 C8.1 C9.1 C10.1 C11.2 C12.2 C13.1 C14.1 C15.1 C16.1 C17.1 C18.1 C19.1 C20.1 C21.1 C22.1 C23.1 C24.1 C25.2 C26.2 C27.2 C31.2 C32.2 C33.2 C34.2 D3.2 J1.7 J2.2 J3.5 P1.3 P1.5 P1.7 P2.2 P3.2 P4.2 P5.2 R3.1 R7.1 R11.1 R20.1 R21.1 R22.1 U1.5 U1.21 U2.5 U2.9 U2.10 U2.14 U2.15 U3.4 U4.5 U4.9 U4.10 U4.14 U4.15 U5.5 U5.9 U5.10 U5.14 U5.15 U6.5 U6.9 U6.10 U6.14 U6.15 U7.2 U7.25 X1.2 X1.4 | length 3486.9
  Top Layer w8: J3.5 v1(4527.82,2507.82) ; v1(4688.56,2695.56) C34.2 C31.2 ; U7.25 4932.37,2650.28 4932.37,2728.37 v1(4953,2749) ; C33.2 v1(5012,2493) ; C13.1 5065.47,1595 v1(5136,1595) ; R11.1 5096.96,1436.5 5118.5,1436.5 v1(5119,1436) ; D3.2 5360.66,1614.59 5392.59,1614.59 v1(5393,1615)
  Top Layer w12: C32.2 v1(4569,2656) ; v1(5012,2284) 5012.27,2283.73 5041.07,2283.73 C5.2 ; R7.1 v1(5167,2065) ; v1(5267,2008) 5267.06,2007.94 5295.21,2007.94 C12.2 5362.2,2007.87 X1.2 ; v1(5356,2529) 5356.15,2528.85 5356.15,2500.15 C7.2 5357.28,2499.02 5357.28,2447.83 U1.21 ; U1.5 5390.75,2119.09 5390.75,2058.07 C9.1 5391.78,2057.04 v1(5419,2057) v1(5419,2057) ; C10.1 v1(5504,2500) ; X1.4 5543.31,1889.76 C11.2 5611.12,1888.88 5645.12,1888.88 v1(5646,1888) ; v1(6246,1155) 6246.24,1154.76 6390.71,1154.76 U4.15 U4.14 ; v1(6341,1455) 6341.24,1454.76 6390.71,1454.76 U4.9 U4.10 ; U4.5 6728.74,1304.53 6781.5,1357.28 C25.2 6782.13,1357.63 6810.37,1357.63 v1(6811,1357) ; R21.1 6742.13,2737.2 6773.72,2768.8 6773.72,2771.75 C26.2 6777.76,2775.8 6805.8,2775.8 v1(6806,2776) ; R22.1 6744.09,1792.32 6775.69,1823.91 6775.69,1826.87 C27.2 6779.88,1830.35 6809.65,1830.35 v1(6810,1830) ; v1(6859,1073) 6859.62,1073.62 6859.62,1093.87 C22.1 ; v1(6859,2490) 6859.62,2490.62 6859.62,2511.19 C23.1 ; C24.1 6860.62,1576.39 6860.62,1550.38 v1(6861,1550)
  Top Layer w16: C14.1 5065.94,1045.28 5075,1054.33 5075,1079 ; U3.4 5075,1079 ; v1(5099,1077) 5097.54,1078.46 5075.54,1078.46 5075,1079 ; C8.1 5992.68,1554.56 6018.44,1554.56 v1(6019,1554) ; v1(6243,1627) U6.15 ; v1(6243,2571) 6243.43,2571.43 6390.52,2571.43 U5.15 U5.14 ; v1(6250,2100) 6250.3,2099.7 6390.65,2099.7 U2.15 U2.14 ; v1(6341,2400) 6341.3,2399.7 6390.65,2399.7 U2.9 U2.10 ; v1(6344,1927) U6.9 ; v1(6351,2873) 6351.57,2872.43 6390.37,2872.43 U5.9 U5.10 ; U6.15 U6.14 ; U6.10 U6.9 ; U6.5 6675.97,1776.97 6690.34,1791.34 R22.1 ; U2.5 6654.41,2249.41 6666.81,2261.81 R3.1 6744.09,2262.8 6756.69,2275.39 6756.69,2276.79 6768.13,2288.23 6768.13,2289.43 6780.72,2302.02 C4.2 v1(6808,2303) ; U5.5 6601.33,2722 6642,2722 6656.22,2736.22 R21.1 ; v1(6860,2026) 6860.12,2026.12 6860.12,2049.09 C3.1
  Top Layer w24: v1(5868,1136) 5921.43,1136 C15.1 5928.96,1136 v1(5985,1136)
NetC4_1: C4.1 U2.6 | length 145.6
  Top Layer w12: U2.6 6602.98,2301.2 6743.49,2301.2 C4.1
NetC6_1: C6.1 R5.2 U2.8 | length 146.7
  Top Layer w12: U2.8 6737.4,2399.41 6744.09,2392.72 R5.2
NetC6_2: C6.2 R4.2 U2.7 | length 144.1
  Top Layer w12: U2.7 6602.66,2350.89 6742.62,2350.89 R4.2
NetC7_1: C7.1 U1.20 | length 54
  Top Layer w12: U1.20 5390.75,2447.83 5390.75,2499.02 C7.1
NetC14_2: C14.2 U3.3 | length 90.7
  Top Layer w24: C14.2 5012.8,1045.28 5025,1057.48 U3.3
NetC25_1: C25.1 U4.6 | length 146.4
  Top Layer w12: U4.6 6603.05,1356.4 6744.19,1356.4 C25.1
NetC26_1: C26.1 U5.6 | length 142.5
  Top Layer w12: U5.6 6603.05,2773.72 6740.26,2773.72 C26.1
NetC27_1: C27.1 U6.6 | length 145
  Top Layer w16: U6.6 6741.34,1826.97 6744.09,1829.72 C27.1
NetC28_1: C28.1 R24.2 U4.8 | length 146.7
  Top Layer w12: U4.8 6737.4,1454.53 6744.09,1447.83 R24.2
NetC28_2: C28.2 R23.2 U4.7 | length 144.1
  Top Layer w12: U4.7 6602.66,1406 6742.62,1406 R23.2
NetC29_1: C29.1 R26.2 U5.8 | length 143.8
  Top Layer w12: U5.8 6602.26,2872.93 6743.01,2872.93 R26.2
NetC29_2: C29.2 R25.2 U5.7 | length 148.2
  Top Layer w12: U5.7 6644.85,2821.85 6657.65,2834.65 C29.2 R25.2
NetC30_1: C30.1 R28.2 U6.8 | length 146
  Top Layer w16: U6.8 6744.22,1926.97 6746.06,1928.81 R28.2
NetC30_2: C30.2 R27.2 U6.7 | length 148.8
  Top Layer w16: U6.7 6732.28,1876.97 6744.09,1888.78 R27.2
NetC31_1: C31.1 U7.5 U7.6 U7.9 | length 344.9
  Top Layer w8: v1(4776,2606) 4775.5,2606.5 4775.5,2639.94 C31.1 4776.96,2640.44 4786.8,2630.6 U7.9 ; v1(4807,2736) 4844,2736 4853.63,2726.37 U7.6 U7.5
  Bottom Layer w8: v1(4776,2606) 4775,2607 4775,2728 4783,2736 v1(4807,2736)
NetC32_1: C32.1 J3.6 J3.7 J3.8 J3.9 J3.10 J3.11 | length 588.9
  Top Layer w19.68: J3.11 J3.11@4318.55,2421.2 ; J3.11@4315,2426.35 4315,2460.57 ; 4337.41,2417.27 4312.7,2441.97 4312.7,2458.28 4315,2460.57 ; J3.7 4315,2460.57 ; C32.1 4483.73,2656.71 4416.86,2656.71 J3.6 4336.57,2657.43 4320,2674 4315,2674 4315,2460.57
NetC33_1: C33.1 U7.16 | length 52
  Top Layer w8: U7.16 4912.69,2497.76 C33.1
NetC34_1: C34.1 J3.1 U7.7 U7.8 | length 469
  Top Layer w8: J3.1 4604.18,2610.18 4634.44,2640.44 C34.1 4726,2663 4731,2668 4789.11,2668 4796.98,2660.13 4825.09,2660.13 ; U7.8 4825.09,2660.13 ; U7.7 4825.09,2660.13
NetC35_2: C35.2 U7.18 | length 128.6
  Top Layer w8: U7.18 4952.06,2521.06 4945,2514 4945,2447 4950,2442 C35.2
NetD1_1: D1.1 R6.2 | length 128.8
  Top Layer w8: D1.1 R6.2
NetD2_1: D2.1 R7.2 | length 129.9
  Top Layer w8: D2.1 R7.2
NetD3_1: D3.1 L1.1 U3.2 | length 726.9
  Top Layer w24: U3.2 4975,1256.94 4989.06,1271 5209.98,1271 L1.1 5230.3,1307.1 D3.1
NetJ1_1: J1.1 U1.23 | length 962.2
  Top Layer w8: J1.1 4681.61,2323 4742.61,2384 5077,2384 5093,2400 5093,2480 5111,2498 5284,2498 5295.28,2486.72 U1.23
NetJ1_2: J1.2 U1.24 | length 986.6
  Top Layer w8: J1.2 4549,2223 4559,2233 4559,2285 4583,2309 4688,2309 4750,2371 5086,2371 5106,2391 5106,2471 5119,2484 5259.09,2484 5263.78,2479.31 U1.24
NetJ1_3: J1.3 U1.2 | length 925.1
  Top Layer w8: v1(5224,2037) 5284,2037 5295.28,2048.28 U1.2 U1.2@5295.28,2134.84
  Bottom Layer w8: J1.3 4676,2123 4762,2037 v1(5224,2037)
NetJ1_5: J1.5 U1.27 | length 1029.2
  Top Layer w8: J1.5 4630,1923 4702,1995 4702,2245 4788,2331 5149.38,2331 5149.68,2330.71 U1.27
NetJ1_6: J1.6 U1.28 | length 1111.7
  Top Layer w8: J1.6 4541.31,1823 4546,1827.69 4546,1893 4562.5,1909.5 4637.5,1909.5 4716,1988 4716,2239 4795,2318 5144,2318 5162.79,2299.21 U1.28
NetP1_2: P1.2 U1.15 | length 581.8
  Top Layer w16: U1.15 5538.48,2363.29 5576.29,2363.29 5604,2391 5604,2432 5578,2458 5578,2617.3 5603.7,2643 5753,2643 5781,2671 P1.2
NetP1_4: P1.4 U1.16 | length 440.3
  Top Layer w16: U1.16 5538.48,2394.78 5571.78,2394.78 5582,2405 5582,2424.3 5557,2449.3 5557,2626 5596.26,2665.26 5634.26,2665.26 P1.4
NetP1_9: P1.9 U1.17 | length 513.2
  Top Layer w16: P1.9 5429,2764 5506,2764 5536,2734 5536,2469 5513.85,2446.85 U1.17
NetP2_3: P2.3 R5.1 | length 655.8
  Top Layer w12: R5.1 6779.53,2390.75 6783.37,2386.91 6784.49,2386.91 6790.4,2381 7064,2381 7197.51,2247.49 7197.51,2149.49 7212,2135 P2.3
NetP2_4: P2.4 R4.1 | length 700.5
  Top Layer w12: R4.1 6779.53,2353.35 6783.37,2357.19 6784.35,2357.19 6791.17,2364 7056.96,2364 7180.51,2240.44 7180.51,2125.49 P2.4
NetP3_3: P3.3 R24.1 | length 599
  Top Layer w12: R24.1 6779.53,1445.87 6783.37,1442.02 6784.38,1442.02 6790.4,1436 6980,1436 7225,1681 P3.3
NetP3_4: P3.4 R23.1 | length 611.7
  Top Layer w12: R23.1 6779.53,1408.46 6783.37,1412.31 6784.35,1412.31 6791.05,1419 6987.04,1419 7205.55,1637.51 7215.49,1637.51 P3.4
NetP4_3: P4.3 R26.1 | length 1367.3
  Top Layer w12: R26.1 6779.53,2873.03 6783.37,2869.19 6784.35,2869.19 6790.54,2863 7262,2863 7420,2705 7420,2158 7442.96,2135.04 P4.3
NetP4_4: P4.4 R25.1 | length 1401.8
  Top Layer w12: R25.1 6779.53,2835.63 6783.37,2839.47 6784.35,2839.47 6790.88,2846 7254.96,2846 7403,2697.96 7403,2150.96 7518.92,2035.04 P4.4
NetP5_3: P5.3 R28.1 | length 1137.2
  Top Layer w16: R28.1 6781.5,1928.15 6783.34,1926.31 6787.4,1926.31 6792.71,1921 7050,1921 7094,1965 7572,1965 7596,1941 7596,1758.34 P5.3
NetP5_4: P5.4 R27.1 | length 1104.2
  Top Layer w16: R27.1 6779.53,1890.75 6781.37,1892.59 6783.33,1892.59 6790.74,1900 7060,1900 7104,1944 7413,1944 7438,1919 7438,1600 7461,1577 7514.66,1577 P5.4
NetQ1_1: Q1.1 U2.2 | length 124.2
  Top Layer w16: U2.2 6604.8,2103.02 6645.02,2103.02 6666.02,2124.02 Q1.1
NetQ8_1: Q8.1 U4.2 | length 124.2
  Top Layer w12: U4.2 6606.8,1160.14 6643.14,1160.14 6662.13,1179.13 Q8.1
NetQ9_1: Q9.1 U5.2 | length 123.1
  Top Layer w12: U5.2 6639.97,2571.85 6647,2578.88 6647,2580 6665.43,2598.43 Q9.1
NetQ10_1: Q10.1 U6.2 | length 124.2
  Top Layer w12: U6.2 6606.8,1632.58 6642.58,1632.58 6661.57,1651.57 Q10.1
NetR1_1: R1.1 R3.2 U2.4 | length 204.8
  Top Layer w12: U2.4 6718.11,2199.41 6779.53,2260.83 R3.2
NetR6_1: R6.1 U1.25 | length 799.3
  Top Layer w8: R6.1 5062,2099 5076,2113 5213.9,2113 5257.09,2156.19 5394.19,2156.19 5433,2195 5433,2278 5409,2302 5365,2302 5273.3,2393.7 U1.25
NetR8_1: R8.1 U3.1 U3.7 U3.8 | length 375
  Top Layer w24: R8.1 4823.89,1183 4925,1183 ; U3.1 4925,1183 ; U3.7 U3.8 4925,1183
NetR10_2: R10.2 R11.2 U3.5 | length 134.7
  Top Layer w16: R10.2 R11.2 5061.02,1407.98 5070.2,1398.8 5070.2,1356.17 U3.5
NetR17_1: R17.1 R20.2 U4.4 | length 205.6
  Top Layer w12: U4.4 6716.14,1254.53 6779.53,1317.91 R20.2
NetR18_1: R18.1 R21.2 U5.4 | length 205.3
  Top Layer w12: U5.4 6662.85,2671.85 6687.85,2696.85 R18.1 6742.13,2697.83 6773.72,2729.43 6773.72,2732.38 R21.2
NetR19_1: R19.1 R22.2 U6.4 | length 205.6
  Top Layer w12: U6.4 6716.14,1726.97 6779.53,1790.35 R22.2
NetU1_9: U1.9 U4.12 | length 1501.7
  Top Layer w16: U1.9 5538.48,2174.31 5567.31,2174.31 5577,2184 5895,2184 5913,2166 5913,1933.3 6177,1669.3 6177,1425 6268.47,1333.53 6342.46,1333.53 6371.46,1304.53 U4.12
NetU1_10: U1.10 U4.11 | length 1487.3
  Top Layer w16: U1.10 5537.68,2205 5907,2205 5934,2178 5934,1942 6198,1678 6198,1433.7 6277.17,1354.53 U4.11
NetU1_11: U1.11 U5.12 | length 1074.5
  Top Layer w16: U1.11 5537.51,2236.11 5710.89,2236.11 v1(5711,2236) ; v1(6319.05,2745.54) 6319.46,2745.54 6343.15,2721.85 U5.12
  Bottom Layer w16: v1(5711,2236) 5713,2236 6222.54,2745.54 v1(6319.05,2745.54)
NetU1_12: U1.12 U5.11 | length 1064.1
  Top Layer w16: U1.12 5537.82,2268.13 5710.04,2268.13 v1(5710.46,2268.54) ; v1(6316,2774) 6317.07,2772.93 6389.87,2772.93 U5.11
  Bottom Layer w16: v1(5710.46,2268.54) 5711.54,2268.54 6217,2774 v1(6316,2774)
NetU1_13: U1.13 U6.12 | length 1249.7
  Top Layer w16: U1.13 5913.79,2299.21 5960,2253 5960,1946 6104,1802 6312,1802 6335.84,1778.16 6389.76,1778.16 U6.12
NetU1_14: U1.14 U6.11 | length 1245.6
  Top Layer w16: U1.14 5925.29,2330.71 5989,2267 5989,1954 6116.03,1826.97 U6.11
RESET: C5.1 C35.1 P1.10 R2.1 U1.29 | length 1121.6
  Top Layer w8: C35.1 4917.44,2415.56 4924,2409 5039,2409 5058,2428 5058,2514 5079,2535 v1(5122,2535) ; R2.1 5076.77,2263.78 ; C5.1 5076.77,2263.78 ; U1.29 5080.71,2267.72 5076.77,2263.78
  Bottom Layer w8: v1(5122,2268) v1(5122,2535) 5122,2554 5247,2679 5348,2679 P1.10
USART_RX: P1.8 U1.31 U7.20 | length 1134.6
  Top Layer w8: U7.20 5456.23,2591.23 5481,2616 P1.8 ; U1.31 5210.77,2204.86 5308.86,2204.86 v1(5309,2205) ; v1(5378,2565) 5378,2590.1
  Bottom Layer w8: v1(5309,2205) 5397,2293 5397,2546 v1(5378,2565)
USART_TX: P1.6 U1.30 U7.21 | length 1245.9
  Top Layer w8: U7.21 5297.79,2610.91 v1(5298.91,2612.04) ; U1.30 5380.22,2236.22 v1(5399,2255)
  Bottom Layer w8: v1(5298.91,2612.04) 5300.04,2610.91 5413,2610.91 ; v1(5399,2255) 5399,2259.23 5413.39,2273.61 5413.39,2610.53 5413,2610.91 ; P1.6 5581,2636 5555.91,2610.91 5413,2610.91
pads on no net: J3.4 U1.3 U1.6 U1.19 U1.22 U1.26 U2.13 U4.13 U5.13 U6.13 U7.1 U7.10 U7.11 U7.12 U7.13 U7.14 U7.15 U7.17 U7.19 U7.22 U7.23 U7.24
copper on no net:
  other v2: 4409.45,1141.73 7519.69,1141.73 4409.45,2834.65 7519.69,2834.65

## Polygon pours and split planes (outlines as drawn)
GND on Bottom Layer "Bottom Layer-GND" (solid, pour order 0): 4232.28,3011.81 7696.85,3011.81 7696.85,954.72 4232.28,954.72
+5V on Top Layer "+5V_L01_P001" (solid, pour order 1): 4212.6,944.88 7716.54,944.88 7716.54,3031.5 4212.6,3031.5

## Keep-outs
Keep-Out Layer:
  lines w10: 4251.97,1062.82 ccw(c4330.71,1062.99) 4330.71,984.25 ; 4251.97,2913.39 cw(c4330.71,2913.39) 4330.53,2992.13 ; 7598.43,2992.13 cw(c7598.43,2913.39) 7677.17,2913.56 ; 7598.6,984.25 ccw(c7598.43,1062.99) 7677.17,1062.99
  lines w19.68: 4251.97,1062.99 4251.97,2913.39 ; 4330.71,984.25 7598.43,984.25 ; 4330.71,2992.13 6181.1,2992.13 7598.43,2992.13 ; 7677.17,1062.99 7677.17,2913.39

## Silkscreen, mask and mechanical layers (free items; w line width, h text height)
Top Overlay:
  text "PROG" at 6035,2562.02 h30 r90
  text "CELL 3" at 7442.51,2440 h30
  text "CELL 1" at 7196.51,2439 h30
  text "1" at 4361,2316 h30 r90
  text "aiRCS Lab / Thrust Tester / 20/04/2k23" at 6209,1979.14 h30 r90
  text "6" at 4368,1808 h30 r90
  text "-" at 4367,1701 h30 r90
  text "+" at 3892.14,1529 h30
  text "+5V" at 5926,1493.02 h30 r90
  text "CELL 4" at 7384.75,1467 h30
  text "CELL 2" at 7156.03,1466 h30
  text "-" at 4357,1324 h30 r90
  text "+24V" at 4519.03,1180 h30

## Text inside footprints (layer, text, board x,y; h text height)
J3: Mechanical 1 "PCB EDGE" at 4248.83,2842.46 h11.81 r270